# Altium PCB MSP-ISO_Rev1_0.PcbDoc
Units mil, origin at the board's own origin, x right, y up, seen from the top; angles counter-clockwise.
Board outline 1874 x 928 mil, 2 copper layers (Top Layer, Bottom Layer), stack 62 mil thick; 23 components, 27 nets, 95 pads, 32 vias.
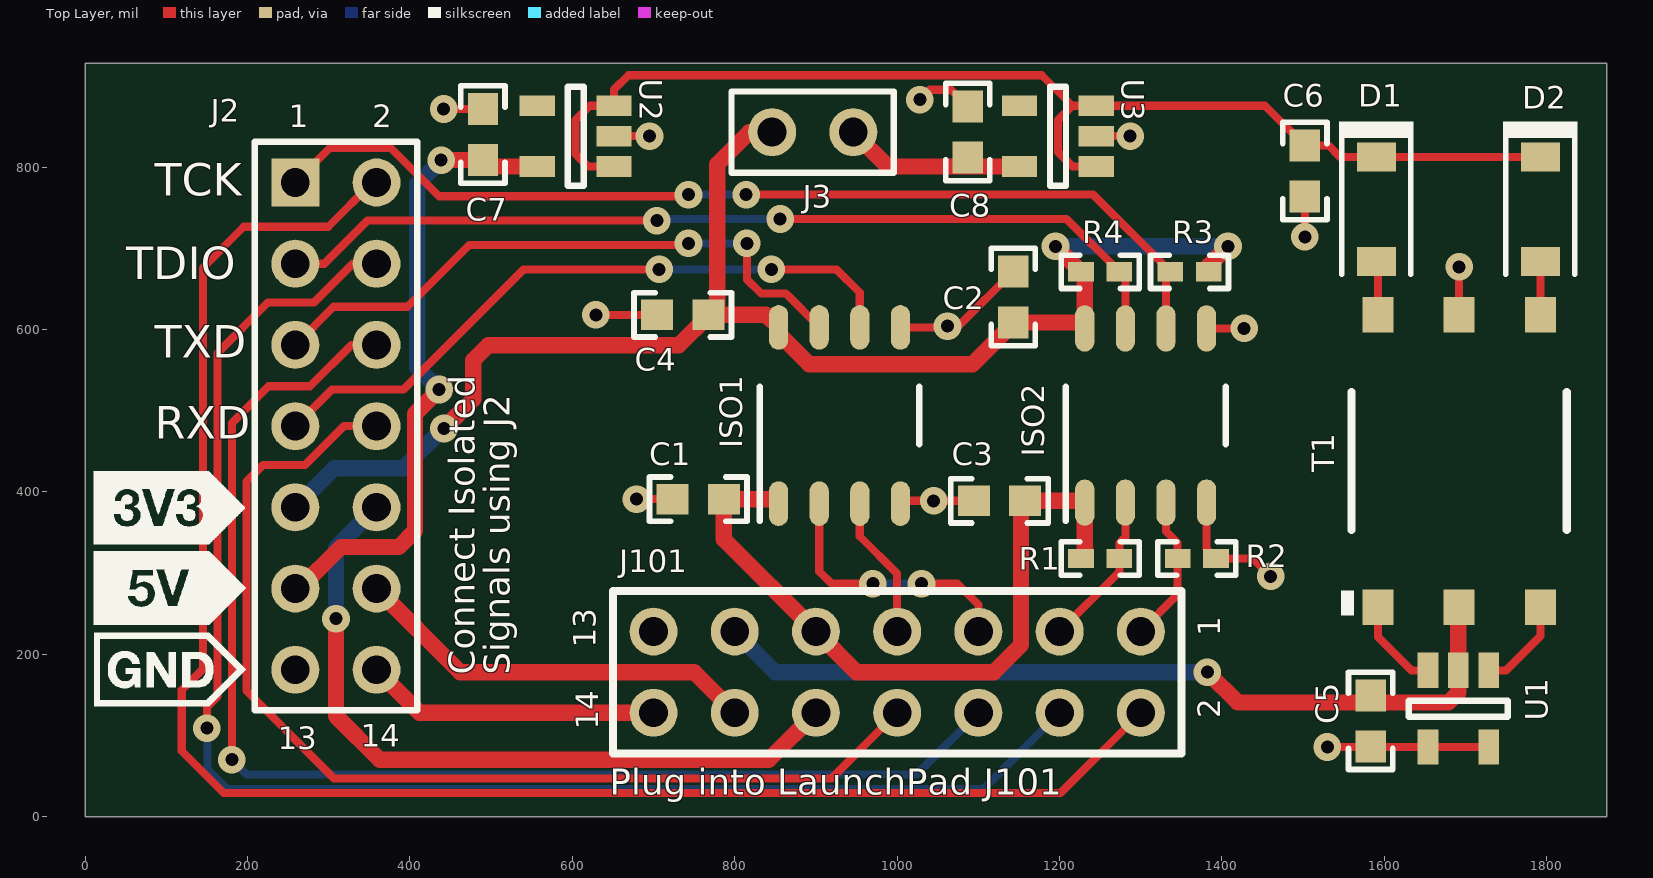
[diagram p0: Top Layer view]
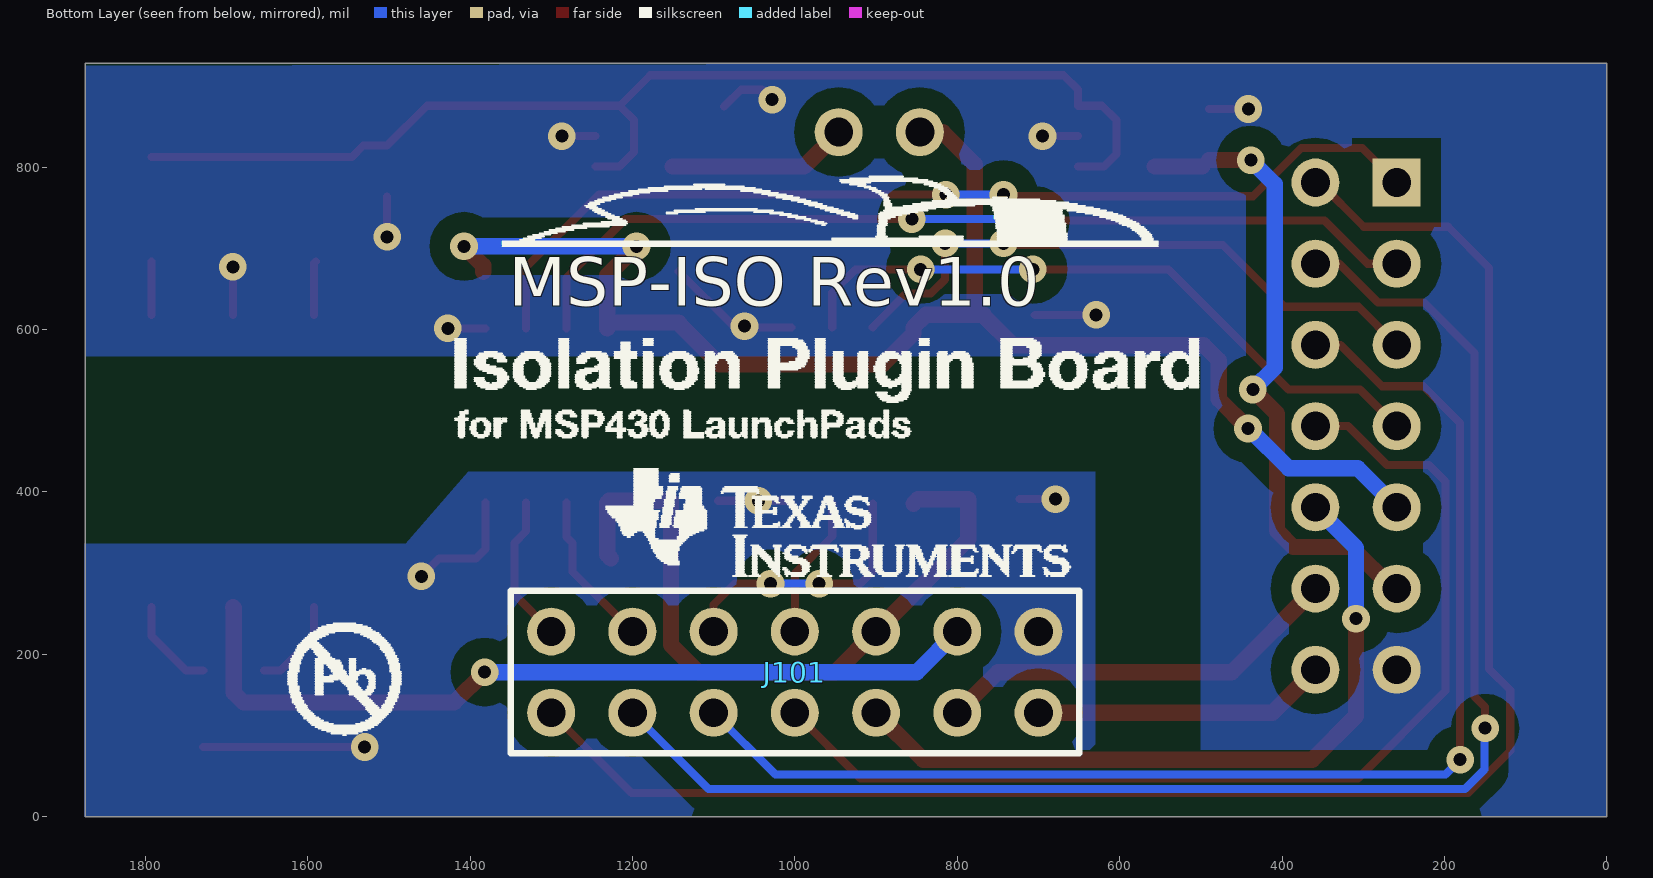
[diagram p1: Bottom Layer view, seen from below]

## Layer stack, top to bottom
Top Solder: solder mask 0.4, Solder Resist, Dk 3.5
Top Layer: signal copper 1.4
Dielectric1: core 59.2, FR-4, Dk 4.8
Bottom Layer: signal copper 1.4
Bottom Solder: solder mask 0.4, Solder Resist, Dk 3.5

## Board outline
0,0 0,928 1874,928 1874,0

## Design rules (kind name [scope] priority, off if disabled: settings)
AcuteAngle [All] p1: minimum=4.50000000000000E+0001 checktracksonly=FALSE
AssemblyTestPointUsage [All] p1: valid=2
Clearance Clearance_Keepouts [((IsTrack Or IsArc) And Not InPoly) And IsFree and IsKeepOut vs ((IsTrack Or IsArc) And Not InPoly) And IsFree and IsKeepOut] p1: gap=0
Clearance Clearance_BoardEdge_MountingHoles [OnCopper and InComponentClass('Mounting Holes') vs IsKeepOut] p2: gap=40
Clearance Clearance_BoardEdge_Poly [OnCopper and InPoly vs IsKeepOut] p3: gap=25
Clearance Clearance_BoardEdge [OnCopper and Not InComponentClass('Logo') and not InComponentClass('FiducialMark') and not InRegion(1000,500,4000,800) and Not IsKeepout vs IsKeepOut] p4: gap=75
Clearance Clearance_Poly [InPolygon] p5: gap=25
Clearance [All] p6: gap=7.87
ComponentClearance ComponentClearance_MountingHoles_FiducialMarks [InComponentClass('Mounting Holes') vs InComponentClass('FiducialMark')] p1: gap=50 collisioncheckmode=3 verticalgap=10 showdistances=FALSE
ComponentClearance ComponentClearance_Shunt [InComponentClass('Header') vs InComponentClass('Shunt')] p2: gap=0 collisioncheckmode=3 verticalgap=0 showdistances=FALSE
ComponentClearance ComponentClearance_Logo [InComponentClass('Logo')] p3: gap=50 collisioncheckmode=3 verticalgap=10 showdistances=FALSE
ComponentClearance ComponentClearance_ScrewToNut [(HasFootprint('NY PMS 440 0025 PH')) vs (HasFootprint('Keystone_1902C'))] p4: gap=5 collisioncheckmode=3 verticalgap=10 showdistances=FALSE
ComponentClearance ComponentClearance_MountingHoles [InComponentClass('Mounting Holes')] p5: gap=250 collisioncheckmode=3 verticalgap=100000 showdistances=FALSE
ComponentClearance ComponentClearance_SmallPassives [HasFootprint('0201*') or HasFootprint('0402*') or HasFootprint('0508') or HasFootprint('0603*') or HasFootprint('0612') or HasFootprint('0805*') or HasFootprint('0815*') or HasFootprint('0830*') or HasFootprint('1206*') or HasFootprint('1210*') or HasFootprint('1808*') or HasFootprint('1812*') or HasFootprint('1825*') or HasFootprint('2010*') or HasFootprint('2220*') or HasFootprint('2225*') or HasFootprint('2512*') or HasFootprint('2728*') or HasFootprint('3518*') vs HasFootprint('0201*') or HasFootprint('0402*') or HasFootprint('0508') or HasFootprint('0603*') or HasFootprint('0612') or HasFootprint('0805*') or HasFootprint('0815*') or HasFootprint('0830*') or HasFootprint('1206*') or HasFootprint('1210*') or HasFootprint('1808*') or HasFootprint('1812*') or HasFootprint('1825*') or HasFootprint('2010*') or HasFootprint('2220*') or HasFootprint('2225*') or HasFootprint('2512*') or HasFootprint('2728*') or HasFootprint('3518*')] p6: gap=20 collisioncheckmode=3 verticalgap=10 showdistances=FALSE
ComponentClearance ComponentClearance_THtoSMT [IsThruComponent vs IsSMTComponent] p7: gap=15 collisioncheckmode=3 verticalgap=15 showdistances=FALSE
ComponentClearance ComponentClearance_THtoTH [IsThruComponent vs IsThruComponent] p8: gap=10 collisioncheckmode=3 verticalgap=15 showdistances=FALSE
ComponentClearance [All] p9: gap=25 collisioncheckmode=3 verticalgap=10 showdistances=FALSE
DiffPairsRouting [All] p1: maxlimit=100 minlimit=10 mostfreqgap=10 toplayer_minwidth=15 toplayer_maxwidth=15 toplayer_prefwidth=15 bottomlayer_minwidth=15 bottomlayer_maxwidth=15 bottomlayer_prefwidth=15 maxuncoupledlength=1000
FabricationTestPointUsage TestPointUsage [All] p1: valid=2 allowmultiple=FALSE
FabricationTestpoint Testpoint [All] p1: side=3 testpointundercomponent=TRUE minsize=40 maxsize=100 preferedsize=60 minholesize=0 maxholesize=40 preferedholesize=32 testpointgrid=1 allowsidetop=TRUE allowsidebottom=TRUE usegrid=TRUE gridtolerance=0.01
FanoutControl Fanout_LCC [IsLCC] p1: bgadir=Out bgaviamode=Centered fanoutstyle=Auto fanoutdirection=Alternating viagrid=1 // Fanout_LCC (Default Rule)
FanoutControl Fanout_BGA [IsBGA] p2: bgadir=Out bgaviamode=Centered fanoutstyle=Auto fanoutdirection=Alternating viagrid=1 // Fanout_BGA (Default Rule)
FanoutControl Fanout_Default [All] p4: bgadir=Out bgaviamode=Centered fanoutstyle=Auto fanoutdirection=Alternating viagrid=1 // Fanout_Default (Default Rule)
FanoutControl Fanout_Small [(CompPinCount < 5)] p5: bgadir=Out bgaviamode=Centered fanoutstyle=Auto fanoutdirection=OutThenIn viagrid=1 // Fanout_Small (Default Rule)
HoleSize [All] p1: absolutevalues=TRUE maxlimit=251 minlimit=8 maxpercent=80.000 minpercent=20.000
MinimumAnnularRing MinimumAnnularRing_ThermalPadVias [IsVia and InAnyComponent] p1: minimumring=5.91
MinimumAnnularRing [All] p2: minimumring=9
MinimumSolderMaskSliver MinimumSolderMaskSliver_Logo [InComponentClass('Logo') vs InComponentClass('Logo')] p1: minsoldermaskwidth=0.7
MinimumSolderMaskSliver [All] p2: minsoldermaskwidth=3.94
PlaneConnect [All] p1: planeconnectstyle=Direct reliefexpansion=10 reliefentries=4 reliefconductorwidth=10 reliefairgap=10
PolygonConnect [All] p1: connectstyle=Direct reliefconductorwidth=10 reliefentries=4 polygonreliefangle="90 Angle" airgapwidth=10
RoutingVias ThermalPadVias [IsVia and InAnyComponent] p1: holewidth=7.87 width=19.68 viastyle="Through Hole" minholewidth=7.87 minwidth=19.68 maxholewidth=12.99 maxwidth=23.62
RoutingVias [All] p2: holewidth=16 width=34 viastyle="Through Hole" minholewidth=7.87 minwidth=26 maxholewidth=40 maxwidth=65
SilkToBoardRegionClearance [Not ((IsComment or IsDesignator) And (Hide <> 'False')) and not InRegion(1000,500,4000,800)] p1:
SilkToSilkClearance SilkToSilkClearance_Pb-FreeLogo [(HasFootprint('Pb-Free_Overlay_Medium') OR HasFootprint('Pb-Free_Overlay_Small')) vs (HasFootprint('Pb-Free_Overlay_Medium') OR HasFootprint('Pb-Free_Overlay_Small'))] p1: silktosilkclearance=0
SilkToSilkClearance [All] p2: silktosilkclearance=5
SilkToSolderMaskClearance "Silk to Solder Mask Opening" [All] p1: minsilkscreentomaskgap=1 clearancetoexposedcopper=FALSE
SolderMaskExpansion [All] p1: expansion=2
UnpouredPolygon [All] p1: allowunpoured=FALSE
Width Width_Power [(InNet('3V3_1') OR InNet('3V3_2') OR InNet('5V_1') OR InNet('ISO_3V3') OR InNet('ISO_5V') OR InNet('LDO_3V3') OR InNet('VO_DCR_5V'))] p1: maxlimit=20 minlimit=10 preferedwidth=20
Width [All] p2: maxlimit=100 minlimit=6 preferedwidth=10 checkconnectedcopper=TRUE
14 further rules are at their usual default settings.

## Classes and differential pairs
component class Addon_Board_v6: C1 C2 C3 C4 C5 C6 C7 C8 D1 D2 ISO1 ISO2 R1 R2 R3 R4 T1 U1 U2 U3

## Components (designator, comment, footprint, x,y, rotation, side; value= is the part's Value field where it differs from the comment)
C1 "0603YC104JAT2A" 0603 755,391 r180 top
C2 "0603YC104JAT2A" 0603 1143,640 r90 top
C3 "0603YC104JAT2A" 0603 1126,389 r180 top
C4 "0603YC104JAT2A" 0603 736,618 r180 top
C5 "C1608X7R1C105K" 0603 1583,118 r270 top
C6 "C1608X7R1C105K" 0603 1502,795 r270 top
C7 "C1608X5R0J475M" 0603 490,840 r90 top
C8 "C1608X5R0J475M" 0603 1087,843 r90 top
D1 "MBR0520LT1G" SOD-123 1590,748 r270 top
D2 "MBR0520LT1G" SOD-123 1792,748 r270 top
ISO1 "ISO7321CDR" D0008B_N 929,494 r90 top
ISO2 "ISO1541DR" D0008A_N 1306,494 r90 top
J2 "Header 7X2" HDR2X7#1 258.9,780.95 r270 top
J3 "Supply_components" HDR1X2 846,843 r0 top
J101 "Header 7X2" HDR2X7#2 1300,228 r180 bottom (schematic designator J1)
R1 "CRCW04021K50JNED" 0402 1250,318 r180 top
R2 "CRCW040230K0JNED" 0402 1369,318 r180 top
R3 "CRCW0402150RJNED" 0402 1250,671 r180 top
R4 "CRCW0402270RJNED" 0402 1360,671 r0 top
T1 "760390014" Wurth_760390013 1692,438 r90 top
U1 "SN6501DBV" DBV0005A_N 1691,133 r270 top
U2 "TPS76350DBVR" DBV0005A_N 604,838 r180 top
U3 "TPS76333DBVR" DBV0005A_N 1198,838 r180 top

## Footprints (in the part's own frame and the unit in brackets; to place one, negate y for a bottom-side part, rotate by r counter-clockwise, add the part's x,y. Pads: shape width x height; smd on the part's side, far side on the other; paste and mask are expansions set on the pad)
0402 [mm] "0402 from SM-752 data"
  rect 0.8x0.6 smd: 1(-0.6,0) 2(0.6,0)
  silkscreen extent -1.22,-0.52 1.22,0.52, body extent -0.55,-0.3 0.55,0.3, height 0.6
0603 [mm] "0603 from SM-752 data"
  rect 1x0.95 smd: 1(-0.8,0) 2(0.8,0)
  silkscreen extent -1.52,-0.69 1.52,0.69, body extent -0.87,-0.47 0.87,0.47, height 0.85
D0008A_N [mm] "SOIC, 8-Leads, Body 4.9x3.9mm, Pitch 1.27mm, IPC Medium Density"
  oval 1.45x0.6 smd: 1(-2.725,1.905) 2(-2.725,0.635) 3(-2.725,-0.635) 4(-2.725,-1.905) 5(2.725,-1.905) 6(2.725,-0.635) 7(2.725,0.635) 8(2.725,1.905)
  silkscreen extent -3.3,-2.5 0.9,2.5, body extent -3,-2.45 3,2.45, height 1.63
D0008B_N [mil] "SOIC, 8-Leads, Body 4.9x3.9mm, Pitch 1.27mm, IPC Medium Density"
  oval 55x23.62 smd: 1(-108.5,75) 2(-108.5,25) 3(-108.5,-25) 4(-108.5,-75) 5(108.5,-75) 6(108.5,-25) 7(108.5,25) 8(108.5,75)
  silkscreen extent -130,-98 35,98, body extent -118,-96 118,96, height 64
DBV0005A_N [mm] "SOT23, 5-Leads, Body 2.9x1.6mm, Pitch 0.95mm, Lead Span 2.8mm, IPC Medium Density"
  rect 1.1x0.65 smd: 1(-1.2,0.95) 2(-1.2,0) 3(-1.2,-0.95) 4(1.2,-0.95) 5(1.2,0.95)
  silkscreen extent -0.25,-1.55 0.25,1.55, body extent -1.42,-1.46 1.42,1.46, height 1.08
HDR1X2 [mm] "Connector; Header; 2 Position"
  round 1.5 hole 0.9 mask+0.127: 1(0,0) 2(2.54,0)
  silkscreen extent -1.27,-1.27 3.81,1.27
HDR2X7#1 [mm] "Connector; Header; 7x2 Position"
  rect 1.5x1.5 hole 0.9 mask+0.127: 1(0,0)
  round 1.5 hole 0.9 mask+0.127: 2(0,2.54) 3(2.54,0) 4(2.54,2.54) 5(5.08,0) 6(5.08,2.54) 7(7.62,0) 8(7.62,2.54) 9(10.16,0) 10(10.16,2.54) 11(12.7,0) 12(12.7,2.54) 13(15.24,0) 14(15.24,2.54)
  silkscreen extent -1.27,-1.27 16.51,3.81
HDR2X7#2 [mm] "Connector; Header; 7x2 Position"
  round 1.5 hole 0.9 mask+0.127: 1(0,0) 2(0,-2.54) 3(2.54,0) 4(2.54,-2.54) 5(5.08,0) 6(5.08,-2.54) 7(7.62,0) 8(7.62,-2.54) 9(10.16,0) 10(10.16,-2.54) 11(12.7,0) 12(12.7,-2.54) 13(15.24,0) 14(15.24,-2.54)
  silkscreen extent -1.27,-3.81 16.51,1.27
SOD-123 [mm] "On Semi recommended land pattern"
  rect 0.915x1.22 smd: 1(-1.638,0) 2(1.637,0)
  silkscreen extent -2.74,-1.17 2.03,1.17, body extent -1.93,-0.9 1.93,0.9, height 1.35
Wurth_760390013 [mil] "Wurth"
  rect 44x38 smd: 1(-180,100) 2(-180,0) 3(-180,-100) 4(180,-100) 5(180,0) 6(180,100)
  silkscreen extent -190,-132 85,145, body extent -198,-135 198,130, height 166

## Part data
C1 C2 C3 C4: "CAP, CERM, 0.1 µF, 16 V, +/- 5%, X7R, 0603"
C5 C6: "CAP, CERM, 1 µF, 16 V, +/- 10%, X7R, 0603"
C7 C8: "CAP, CERM, 4.7 µF, 6.3 V, +/- 20%, X5R, 0603"
D1 D2: "Diode, Schottky, 20 V, 0.5 A, SOD-123"
ISO1: "Robust EMC, Low Power, Dual-Channel Digital Isolators, D0008B"
ISO2: "Low-Power Bidirectional I2C Isolators, D0008A"
J2 J101: "Header, 7-Pin, Dual row"
J3: library part "Header 2", "Header, 2-Pin"
R1: "RES, 1.5 k, 5%, 0.063 W, 0402"
R2: "RES, 30 k, 5%, 0.063 W, 0402"
R3: "RES, 150, 5%, 0.063 W, 0402"
R4: "RES, 270, 5%, 0.063 W, 0402"
T1: "Transformer, 475uH, SMT"
U1: "Transformer Driver for Isolated Power Supplies, DBV0005A"
U2: "Single Output LDO, 150 mA, Fixed 5 V Output, 2.7 to 10 V Input, with Low IQ, 5-pin SOT-23 (DBV), -40 to 125 degC, Green (RoHS & no Sb/Br)"
U3: "Single Output LDO, 150 mA, Fixed 3.3 V Output, 2.7 to 10 V Input, with Low IQ, 5-pin SOT-23 (DBV), -40 to 125 degC, Green (RoHS & no Sb/Br)"

## Via types
v1: diameter 34, hole 16, Top Layer to Bottom Layer, tented both sides, 32 vias

## Nets (pads, with @x,y where several pads share a name; then routed paths per layer and width w, separated by ;. In a path a pad name is that pad's centre, name@x,y a point inside that pad or via, vN(x,y) a via of type N, cw(c..) or ccw(c..) an arc to the next point about the centre after c; other vN are vias at no path point)
3V3_1: C1.1 C3.1 ISO1.1 ISO2.1 J101.9 R1.2 | length 889.5
  Top Layer w20: ISO1.1 848.5,391 C1.1 786.5,341.5 J101.9 950,178 1119,178 1152.6,211.6 C3.1@1152.6,389 ; C3.1 1228.72,389 ISO2.1 1231,322.62 R1.2
3V3_2: C2.1 C4.1 ISO1.8 ISO2.8 J2.9 J3.1 R3.2 R4.2 | length 1770.8
  Top Layer w20: v1(442,478) 478,514 478,562 496.43,580.43 731.09,580.43 C4.1@766.99,616.33 ; C4.1 838.5,618 ISO1.8 854,594.83 891.7,557.13 1092.84,557.13 1143,607.28 C2.1 ISO2.8@1223.78,608.5 ; C4.1@778.5,627.84 778.5,803.5 818,843 J3.1 ; v1(1195,702.38) R3.2 1231,666.38 ISO2.8 ; R4.2 1383.62,678.62 v1(1407.38,702.38)
  Bottom Layer w20: J2.9 306.95,429 392,429 441,478 v1(442,478) ; v1(1195,702.38) v1(1407.38,702.38)
5V_1: C5.1 J101.11 T1.2 U1.2 | length 1042.8
  Top Layer w20: v1(1382,178) 1419.28,140.72 1679.03,140.72 1691,152.69 U1.2 1691,257 T1.2
  Bottom Layer w20: J101.11@805,228 J101.11 850,178 v1(1382,178)
5V_2: C7.1 J2.11 U2.5 | length 779.3
  Top Layer w20: J2.11 263.95,280.95 315,332 386.21,332 406.3,352.09 406.3,496.3 v1(436,526) ; v1(438.5,808.5) C7.1 ; C7.1@497.91,800.6 U2.5
  Bottom Layer w20: v1(436,526) 409,553 409,779 v1(438.5,808.5)
EZFET_SBWTCK: ISO2.3 J101.1 R2.2 | length 183.5
  Top Layer w10: J101.1 1345.38,273.38 R2.2 1345.38,337.12 1331,351.5 ISO2.3
EZFET_SBWTDIO: ISO2.2 J101.3 R1.1 | length 192.3
  Top Layer w10: J101.3 1273.62,301.62 R1.1 1273.62,337.12 1281,344.5 ISO2.2
EZFET_UARTRXD: ISO1.2 J101.5 | length 341.6
  Top Layer w10: ISO1.2 904,302 919,287 v1(970,287) ; v1@1017.87,287 v1(1030,287) 1074.04,287 1100,261.04 J101.5
  Bottom Layer w10: v1(970,287) v1(1030,287)
EZFET_UARTTXD: ISO1.3 J101.7 | length 200.3
  Top Layer w10: ISO1.3 954,345.36 1000,299.36 J101.7 J101.7@976.26,228
GND1: C1.2 C3.2 C5.2 ISO1.4 ISO2.4 J101.13 R2.1 U1.4 U1.5 | length 485.1
  Top Layer w10: v1(679,391) C1.2 ; ISO1.4 1007.5,389 v1(1045,389) C3.2 ; ISO2.4 1381,329.62 R2.1 1438,318 v1(1460,296) ; v1(1529.76,85.76) U1.4 U1.5
GND2: C2.2 C4.2 C6.2 C7.2 C8.2 ISO1.5 ISO2.5 J2.13 T1.5 U2.2 U3.2 | length 608
  Top Layer w10: v1(441.49,871.49) C7.2 ; v1(629,618) C4.2 ; U2.2 v1(695,838) ; ISO1.5 v1@1060.5,602.5 ; v1(1028,883) 1040.13,895.13 1066.37,895.13 C8.2 ; v1(1062,604) 1075.5,604 C2.2 ; U3.2 v1(1287,838) ; ISO2.5 v1(1427.28,601.28) ; v1(1502,714) C6.2 ; T1.5 v1(1692,677)
  Bottom Layer w10: v1@1024,887 v1(1028,883)
ISO_SBWTCK: ISO2.6 J2.1 R4.1 | length 1237.8
  Top Layer w10: J2.1 301.3,823.36 376.46,823.36 435.82,764 745,764 v1(743,766) ; v1@812,766 v1(814,766) 1241.38,766 R4.1 1331,665.62 ISO2.6
  Bottom Layer w10: v1(743,766) v1(814,766)
ISO_SBWTDIO: ISO2.7 J2.3 R3.1 | length 1137
  Top Layer w10: J2.3 294.95,680.95 348,734 v1(704,734) ; v1(856,736) 1208.62,736 R3.1 1281,663.62 ISO2.7
  Bottom Layer w10: v1(704,734) 705.87,735.87 v1@855.87,735.87
ISO_UARTRXD: ISO1.6 J2.7 | length 829.8
  Top Layer w10: J2.7 303.95,526 392,526 540,674 v1(707,674) ; v1(845,674) 925.46,674 954,645.46 ISO1.6
  Bottom Layer w10: v1(707,674) v1(845,674)
ISO_UARTTXD: ISO1.7 J2.5 | length 772.9
  Top Layer w10: J2.5 305.95,628 397,628 473.13,704.13 741.13,704.13 v1(743,706) ; v1(815,706) v1@815,713 ; v1@815.13,705.88 815.13,661.63 832.63,644.13 862.37,644.13 863.63,642.87 864.22,642.87 904,603.1 ISO1.7
  Bottom Layer w10: v1(743,706) v1(815,706)
NetC6_1: C6.1 D1.1 D2.1 U2.1 U2.3 U3.1 U3.3 | length 1478.5
  Top Layer w10: U2.1 619.4,800.6 604,816 604,857.68 621.72,875.4 U2.3 651.25,895.25 669,913 1178,913 1215.6,875.4 1215.72,875.4 ; U3.1 1215.72,800.6 1198,818.31 1198,857.68 1215.72,875.4 ; D2.1 D1.1 1545.53,812.47 1531.5,826.5 C6.1 1453.1,875.4 U3.3 1215.72,875.4
NetC8_1: C8.1 J3.2 U3.5 | length 222.3
  Top Layer w20: J3.2 988.4,800.6 U3.5
NetD1_2: D1.2 T1.6 | length 66.4
  Top Layer w10: D1.2 1592,681.53 T1.6
NetD2_2: D2.2 T1.4 | length 65.5
  Top Layer w10: T1.4 D2.2
NetJ2_2: J2.2 J101.2 | length 2106.5
  Top Layer w10: J2.2 353.95,780.95 299.43,726.43 195.43,726.43 145,676 145,182 119,156 119,81 170.75,29.25 1201.25,29.25 J101.2
NetJ2_4: J2.4 J101.4 | length 1858.2
  Top Layer w10: v1(150,109) 150,135.17 162.88,148.04 162.88,570.88 225,633 282,633 329.95,680.95 J2.4
  Bottom Layer w10: v1(150,109) 150.88,108.13 150.88,57.88 174.63,34.13 1106.13,34.13 J101.4
NetJ2_6: J2.6 J101.6 | length 1590.8
  Top Layer w10: v1(180.75,70.25) 180.75,484.75 226,530 277,530 327.95,580.95 J2.6
  Bottom Layer w10: v1(180.75,70.25) 199,52 1024,52 J101.6
NetJ2_8: J2.8 J101.8 | length 1325.7
  Top Layer w10: J2.8 318.86,480.95 270.91,433 219,433 198.62,412.62 198.62,155.1 306.6,47.13 919.13,47.13 J101.8
NetJ2_10: J2.10 J101.10 | length 915.1
  Top Layer w20: v1(308.95,243.95) 308.95,124.06 363,70 842,70 J101.10
  Bottom Layer w20: v1(308.95,243.95) 308.95,331 J2.10
NetJ2_12: J2.12 J101.12 | length 504.5
  Top Layer w20: J2.12 461.85,178 750,178 J101.12
NetJ2_14: J2.14 J101.14 | length 363
  Top Layer w20: J2.14 411.85,128 J101.14
NetT1_1: T1.1 U1.3 | length 115.2
  Top Layer w10: T1.1 1592,221.49 1633.25,180.25 U1.3
NetT1_3: T1.3 U1.1 | length 116.6
  Top Layer w10: U1.1 1749.75,180.25 1792,222.49 T1.3
pads on no net: U2.4 U3.4

## Polygon pours and split planes (outlines as drawn)
GND2 on Bottom Layer "Top Layer-No Net" (solid, remove dead copper, pour order 15): 0,878.55 0,0 500,0 500,567 1874,567 1874,924.86 599,928 212,928 0,928
GND1 on Bottom Layer "Bottom Layer-No Net" (solid, remove dead copper, pour order 18): 1875.06,0 1875.06,94.63 1875.06,336 1771.54,336 1582,336 1479.41,336 1402.4,425 630,425 630,0

## Keep-outs
Keep-Out Layer:
  text ".Layer_Name" at -4434.1,-3547.53 h60

## Other copper
Top Layer:
  text ".Layer_Name" at -4434.1,-3547.53 h60
Bottom Layer:
  text ".Layer_Name" at -4434.1,-3547.53 h60

## Silkscreen, mask and mechanical layers (free items; w line width, h text height)
Top Overlay:
  drawing of 2463 lines, arcs and shapes, not listed
  text "TCK" at 85.62,764.36 h40
  text "TDIO" at 51,662 h40
  text "TXD" at 85.62,565.13 h40
  text "RXD" at 85.62,465.13 h40
  text "Connect Isolated" at 480,175 h32 r90
  text "Signals using J2" at 523,175 h32 r90
  text "Plug into LaunchPad J101" at 646,27 h32
  text ".Layer_Name" at -4434.1,-3547.53 h60
Bottom Overlay:
  drawing of 2224 lines, arcs and shapes, not listed
  text "MSP-ISO Rev1.0" at 1352,629 h60
  text ".Layer_Name" at -4434.1,-3547.53 h60
Top Paste:
  text ".Layer_Name" at -4434.1,-3547.53 h60
Bottom Paste:
  text ".Layer_Name" at -4434.1,-3547.53 h60
Top Solder:
  text ".Layer_Name" at -4434.1,-3547.53 h60
  text ".Layer_Name" at -4434.1,-3547.53 h60
Bottom Solder:
  text ".Layer_Name" at -4434.1,-3547.53 h60
Drill Guide:
  text ".Layer_Name" at -4434.1,-3547.53 h60
M1 Board Outline:
  the board outline again, w10
  text ".Layer_Name" at -4434.1,-3547.53 h60
M2 Board Dimensions:
  rectangle: -5011.1,-2964.04 -4886.1,-2839.04
  rectangle: -4886.1,-3089.04 -4511.1,-2964.04
  lines w7: -5011.1,-2964.04 -4011.1,-2964.04 ; -4886.1,-3089.04 -4886.1,-2839.04 ; -4761.1,-3089.04 -4761.1,-2839.04 ; -4511.1,-3089.04 -4511.1,-2839.04 ; -4261.1,-3089.04 -4261.1,-2839.04 ; -5011.1,-3089.04 -4011.1,-3089.04 -4011.1,-2839.04 -5011.1,-2839.04 -5011.1,-3089.04
  text ".Layer_Name" at -4434.1,-3547.53 h60
M3 3D STEP Top:
  text ".Layer_Name" at -4434.1,-3547.53 h60
M4 3D STEP Bottom:
  text ".Layer_Name" at -4434.1,-3547.53 h60
M5 Assembly Top:
  lines w10: -5303.1,-3619.21 1296.9,-3619.21 ; -5303.1,-3415.87 1298.9,-3415.87 ; -5303.1,-3212.54 -5303.1,-3822.54 -1298.1,-3822.54 1298.9,-3822.54 1298.9,-3212.54 -5302.6,-3212.54 -5302.6,-3822.54 -3727.1,-3822.54 ; -2838.1,-3822.54 -2838.1,-3212.54 ; -1571.1,-3415.87 -1571.1,-3212.54 ; -731.1,-3415.87 -731.1,-3212.54 ; -109.1,-3829.04 -109.1,-3626.21
  text "COMPONENTS MARKED 'DNP' SHOULD NOT BE POPULATED." at -3857.6,-3007.54 h60
  text "ASSEMBLY VARIANT:" at -3858.1,-3123.04 h60
  text ".VariantName" at -2822.1,-3123.04 h60
  text "PCB VIEWED FROM TOP SIDE" at -5239.6,-3344.71 h60
  text "BOARD #:" at -2763.1,-3344.71 h60
  text ".PRJ_Number" at -2217.6,-3344.71 h60
  text "REV:" at -1373.1,-3344.71 h60
  text ".PCB_Rev" at -1081.6,-3344.71 h60
  text "SVN REV:" at -535.1,-3344.71 h60
  text ".VersionControl_RevNumber" at -29.1,-3344.71 h60
  text "PLOT NAME =" at -5239.6,-3753.38 h60
  text ".plot_File_Name" at -4434.1,-3753.38 h60
  text "GENERATED    :" at -2761.1,-3753.38 h60
  text ".Print_Date" at -1891.6,-3753.38 h60
  text ".Print_Time" at -1162.6,-3753.38 h60
  text "TEXAS INSTRUMENTS" at 101.9,-3753.38 h60
  text "PLOT NAME =" at -901.37,-5654.56 h60
M6 Assembly Bottom:
  lines w10: -5303.6,-3416.37 1298.4,-3416.37 ; -5301.6,-3619.71 1298.4,-3619.71 ; -3895.6,-3829.54 -3895.6,-3626.71 ; -3273.6,-3416.37 -3273.6,-3213.04 ; -2433.6,-3416.37 -2433.6,-3213.04 ; -1166.6,-3823.04 -1166.6,-3213.04 ; -277.6,-3823.04 1297.9,-3823.04 1297.9,-3213.04 -5303.6,-3213.04 -5303.6,-3823.04 -2706.6,-3823.04 1298.4,-3823.04 1298.4,-3213.04 ; 1512,94 1512,296.83
  text "COMPONENTS MARKED 'DNP' SHOULD NOT BE POPULATED." at 1090.9,-3007.04 h60
  text ".VariantName" at 46.9,-3123.04 h60
  text "ASSEMBLY VARIANT:" at 1085.9,-3123.04 h60
  text ".VersionControl_RevNumber" at -3975.6,-3345.21 h60
  text "SVN REV:" at -3469.6,-3345.21 h60
  text ".PCB_Rev" at -2923.1,-3345.21 h60
  text "REV:" at -2631.6,-3345.21 h60
  text ".PRJ_Number" at -1787.1,-3345.21 h60
  text "BOARD #:" at -1241.6,-3345.21 h60
  text "PCB VIEWED FROM BOTTOM SIDE" at 1234.9,-3345.21 h60
  text "TEXAS INSTRUMENTS" at -4106.6,-3753.88 h60
  text ".Print_Time" at -2842.1,-3753.88 h60
  text ".Print_Date" at -2113.1,-3753.88 h60
  text "GENERATED    :" at -1243.6,-3753.88 h60
  text ".plot_File_Name" at 429.4,-3753.88 h60
  text "PLOT NAME =" at 1234.9,-3753.88 h60
M9 Title Sheet:
  drawing of 57 lines, arcs and shapes, not listed
  text "1" at -4271.26,5347.46 h70
  text "2" at -1775.6,5347.46 h70
  text "3" at 713.75,5347.46 h70
  text "4" at 3220.41,5347.46 h70
  text "5" at 5719.4,5347.46 h70
  text "6" at 8224.4,5347.46 h70
  text "A" at -5427.6,4204.46 h70
  text "A" at 9372.4,4204.46 h70
  text "B" at -5427.6,1824.46 h70
  text "B" at 9372.4,1824.46 h70
  text "C" at -5427.6,-550.54 h70
  text "C" at 9372.4,-550.54 h70
  text "PROJECT TITLE:" at 6332.4,-2411.54 h45
  text ".PRJ_Title" at 6382.4,-2544.87 h70
  text "DESIGNED FOR:" at 6332.4,-2712.54 h45
  text ".PRJ_Customer" at 6382.4,-2852.54 h70
  text "D" at -5427.6,-2920.54 h70
  text "D" at 9372.4,-2920.54 h70
  text "FILE NAME:" at 6332.4,-3012.54 h45
  text ".PCB_File_Name_No_Path" at 6382.4,-3132.54 h70
  text "Texas Instruments (TI) and/or its licensors do not warrant the accuracy or completeness of this specification" at 1362.9,-3294.38 h45
  text "ENGINEER:" at 6332.4,-3302.54 h45
  text "LAYOUT BY:" at 7837.4,-3302.54 h45
  text "or any information contained therein. TI and/or its licensors do not warrant that this design will meet" at 1317.92,-3407.05 h45
  text ".PRJ_Engineer" at 6382.4,-3457.53 h70
  text ".PCB_Layout" at 7887.9,-3457.53 h70
  text "the specifications, will be suitable for your application or fit for any particular purpose, or will operate in" at 1317.92,-3519.71 h45
  text ".Layer_Name" at -4434.1,-3547.53 h60
  text "ALTIUM DESIGNER VERSION:" at 7837.4,-3612.54 h45
  text "an implementation. TI and/or its licensors do not warrant that the design is production worthy. You should" at 1317.92,-3632.38 h45
  text "completely validate and test your design implementation to confirm the system functionality for your application." at 1362.9,-3745.04 h45
  text ".print_Scale" at 6382.4,-3745.87 h70
  text ".Application_BuildNumber" at 7887.9,-3745.87 h70
  text "1" at -4271.26,-3952.54 h70
  text "2" at -1775.6,-3952.54 h70
  text "3" at 713.75,-3952.54 h70
  text "4" at 3220.41,-3952.54 h70
  text "5" at 5719.4,-3952.54 h70
  text "6" at 8224.4,-3952.54 h70
M10 Fab Notes:
  drawing of 185 lines, arcs and shapes, not listed
  text "DESIGN INFORMATION" at 7369.92,3220.96 h60
  text "MIN. TRACK WIDTH:" at 6725.36,3040.96 h60
  text "8" at 7821.6,3040.96 h60
  text "MIL" at 7976.36,3040.96 h60
  text "MIN. CLEARANCE:" at 6725.36,2908.96 h60
  text "0.2" at 7761.6,2908.96 h60
  text "mm" at 7976.36,2908.96 h60
  text "MIN. VIA PAD SIZE:" at 6725.36,2776.96 h60
  text "24" at 7791.61,2776.96 h60
  text "MIL" at 7976.36,2776.96 h60
  text "0.05mm (2MIL)" at 7420.36,2635.25 h60
  text "MINIMUM ANNULAR RING" at 6396.13,2630.96 h60
  text "EXTERNAL" at 8128.36,2630.96 h60
  text "PER" at 6596.13,2512.96 h60
  text "IPC-D-275 CLASS 2 LEVEL C" at 6816.13,2512.96 h60
  text "MIL, HOLES" at 8304.36,2400.67 h60
  text "+/-" at 7911.9,2399.96 h60
  text "+/-" at 8765.9,2399.96 h60
  text "REGISTRATION TOLERANCES:" at 6396.13,2394.96 h60
  text "METAL" at 7595.9,2394.96 h60
  text "5" at 8172.1,2394.96 h60
  text "3" at 9005.1,2394.96 h60
  text "MIL" at 9121.36,2394.96 h60
  text "MATERIAL:" at 6321.36,2185.5 h60
  text "FR-4 High Tg" at 7307.8,2045.17 h60
  text "FR-408" at 6742.36,2036.6 h60
  text "X" at 7154.36,2036.6 h60
  text "OTHER" at 8230.36,2036.6 h60
  text "62 MIL (1.6mm) +/-10%" at 7062.46,1873.88 h60
  text "THICKNESS:" at 6396.13,1869.6 h60
  text "X" at 6934.3,1869.6 h60
  text "OTHER" at 8347.36,1869.6 h60
  text "TOLERANCE:" at 6396.13,1711.6 h60
  text "X" at 7235.44,1711.6 h60
  text "ANSI IPC-6012 TYPE 3 CLASS 2" at 7422.38,1711.6 h60
  text "OTHER +/-" at 7422.36,1555.6 h60
  text "BOW & TWIST:" at 6396.13,1398.6 h60
  text "X" at 7235.44,1398.6 h60
  text "ANSI IPC-6012 TYPE 3 CLASS 2" at 7422.38,1398.6 h60
  text "OTHER +/-" at 7422.36,1240.09 h60
  text "DRILLING:" at 6321.36,1101.6 h60
  text "REFERENCE:" at 6396.13,984.6 h60
  text "X" at 7044.36,984.6 h60
  text "AS SHOWN" at 7231.36,984.6 h60
  text "X" at 7945.36,984.6 h60
  text "NC_DRILL FILES" at 8082.36,984.6 h60
  text "PTH MIN COPPER THICKNESS:" at 6396.13,826.6 h60
  text "X" at 7746.36,826.6 h60
  text "1MIL" at 7883.36,826.6 h60
  text "OTHER" at 8380.36,826.6 h60
  text "BOARD FINISH:" at 6321.36,667.6 h60
  text "SILKSCREEN:" at 6476.58,549.6 h60
  text "X" at 7425.36,549.6 h60
  text "TOP" at 7551.36,549.6 h60
  text "X" at 7935.36,549.6 h60
  text "BOTTOM" at 8062.36,549.6 h60
  text "SILKSCREEN COLOR:" at 6476.58,382.6 h60
  text "X" at 7424.32,382.6 h60
  text "WHITE" at 7551.36,382.6 h60
  text "OTHER" at 8062.36,382.6 h60
  text "SOLDER RESIST COLOR:" at 6476.58,212.6 h60
  text "X" at 7044.32,53.4 h60
  text "RED" at 7171.36,53.4 h60
  text "BLUE" at 7762.36,53.4 h60
  text "OTHER" at 8300.36,53.4 h60
  text "IMMERSION GOLD (ENIG)" at 7382.36,-135.12 h60
  text "ENEPIG" at 8719.9,-138.4 h60
  text "SURFACE FINISH:" at 6321.36,-139.4 h60
  text "X" at 7195.42,-139.4 h60
  text "IMM. TIN/SILVER OR EQUIV" at 6650.9,-296.4 h60
  text "OTHER" at 8082.36,-296.4 h60
  text "ARRAY/PANEL:" at 6321.36,-475.4 h60
  text "CUT AND TRIM PER MECH LAYER 1" at 7382.36,-479.69 h60
  text "N.C. ROUTE" at 7382.36,-631.4 h60
  text "X" at 8061.36,-631.4 h60
  text "V. SCORE" at 8248.36,-631.4 h60
  text "CERTIFICATION:" at 6321.36,-768.4 h60
  text "MATERIALS AND WORKMANSHIP FOR ALL PCBS" at 7046.36,-768.4 h60
  text "TO MEET OR EXCEED THE REQUIREMENTS OF:" at 7046.36,-866.4 h60
  text "X" at 6672.87,-1002.91 h60
  text "ANSI IPC-A-600F CLASS ->" at 6811.86,-1002.91 h60
  text "X" at 8450.92,-1002.91 h60
  text "2" at 8569.86,-1002.91 h60
  text "1" at 8254.87,-1004.4 h60
  text "3" at 8923.86,-1004.4 h60
  text "X" at 6674.92,-1162.4 h60
  text "UL 94V-0" at 6811.87,-1162.4 h60
  text "X" at 7486.92,-1162.4 h60
  text "RoHS" at 7623.87,-1162.4 h60
  text "OTHER" at 8268.27,-1162.4 h60
  text "PER ORDER" at 8665.32,-1162.4 h60
  text "ADDITIONAL REQUIREMENTS:" at 6321.36,-1303.4 h60
  text "MICROSECTION:" at 6396.13,-1418.4 h60
  text "YES" at 7301.86,-1418.4 h60
  text "REQUIRED" at 8163.36,-1574.55 h60
  text "BARE BOARD ELEC. TEST:" at 6396.13,-1577.4 h60
  text "NONE" at 7701.86,-1577.4 h60
  text "X" at 8036.36,-1577.4 h60
  text "PER ORDER" at 8755.36,-1577.4 h60
  text "MANUFACTURER'S UL:" at 6396.13,-1734.4 h60
  text "RAIL" at 7561.86,-1738.69 h60
  text "METAL" at 8053.68,-1738.69 h60
  text "X" at 8428.9,-1739.04 h60
  text "SILK" at 8565.36,-1738.69 h60
  text ".Layer_Name" at -4434.1,-3547.53 h60
M11 Gerber Information:
  lines w10: -5303.1,-3619.21 1296.9,-3619.21 ; -5303.1,-3415.87 1298.9,-3415.87 ; -5303.1,-3212.54 -5303.1,-3822.54 -1298.1,-3822.54 1298.9,-3822.54 1298.9,-3212.54 -5302.6,-3212.54 -5302.6,-3822.54 -3727.1,-3822.54 ; -2838.1,-3822.54 -2838.1,-3212.54 ; -1571.1,-3415.87 -1571.1,-3212.54 ; -731.1,-3415.87 -731.1,-3212.54 ; -109.1,-3829.04 -109.1,-3626.21
  text "ALL ARTWORK VIEWED FROM TOP SIDE" at -5239.6,-3344.71 h60
  text "BOARD #:" at -2763.1,-3344.71 h60
  text ".PRJ_Number" at -2217.6,-3344.71 h60
  text "REV:" at -1373.1,-3344.71 h60
  text ".PCB_Rev" at -1081.6,-3344.71 h60
  text "SVN REV:" at -535.1,-3344.71 h60
  text ".VersionControl_RevNumber" at -29.1,-3344.71 h60
  text "LAYER NAME =" at -5239.6,-3547.53 h60
  text "PLOT NAME =" at -5239.6,-3753.38 h60
  text ".plot_File_Name" at -4434.1,-3753.38 h60
  text "GENERATED    :" at -2761.1,-3753.38 h60
  text ".Print_Date" at -1891.6,-3753.38 h60
  text ".Print_Time" at -1162.6,-3753.38 h60
  text "TEXAS INSTRUMENTS" at 101.9,-3753.38 h60
  text "LAYER NAME =" at -901.37,-5448.72 h60
  text "PLOT NAME =" at -901.37,-5654.56 h60
M12 Stackup:
  drawing of 191 lines, arcs and shapes, not listed
  text "Layer" at 4779.24,5140.96 h60
  text "Name" at 5189.16,5140.96 h60
  text "Material" at 6118.9,5140.96 h60
  text "Thickness" at 6978.67,5140.96 h60
  text "Constant" at 7628.5,5140.96 h60
  text "Board Layer Stack" at 8198.37,5140.96 h60
  text "1" at 4779.24,5020.96 h60
  text "Top Overlay" at 5189.16,5020.96 h60
  text "2" at 4779.24,4900.96 h60
  text "Top Solder" at 5189.16,4900.96 h60
  text "Solder Resist" at 6118.9,4900.96 h60
  text "0,40mil" at 6978.67,4900.96 h60
  text "3,5" at 7628.5,4900.96 h60
  text "3" at 4779.24,4780.96 h60
  text "Top Layer" at 5189.16,4780.96 h60
  text "Copper" at 6118.9,4780.96 h60
  text "1,40mil" at 6978.67,4780.96 h60
  text "4" at 4779.24,4660.96 h60
  text "Dielectric1" at 5189.16,4660.96 h60
  text "FR-4" at 6118.9,4660.96 h60
  text "59,20mil" at 6978.67,4660.96 h60
  text "4,8" at 7628.5,4660.96 h60
  text "5" at 4779.24,4540.96 h60
  text "Bottom Layer" at 5189.16,4540.96 h60
  text "Copper" at 6118.9,4540.96 h60
  text "1,40mil" at 6978.67,4540.96 h60
  text "6" at 4779.24,4420.96 h60
  text "Bottom Solder" at 5189.16,4420.96 h60
  text "Solder Resist" at 6118.9,4420.96 h60
  text "0,40mil" at 6978.67,4420.96 h60
  text "3,5" at 7628.5,4420.96 h60
  text "7" at 4779.24,4300.96 h60
  text "Bottom Overlay" at 5189.16,4300.96 h60
  text ".Layer_Name" at -4434.1,-3547.53 h60
M13 Component Bodies Top:
  text ".Layer_Name" at -4434.1,-3547.53 h60
M14 Component Bodies Bottom:
  text ".Layer_Name" at -4434.1,-3547.53 h60
M15 Courtyards Top:
  text ".Layer_Name" at -4434.1,-3547.53 h60
M16 Courtyards Bottom:
  text ".Layer_Name" at -4434.1,-3547.53 h60
Drill Drawing:
  text ".Layer_Name" at -4434.1,-3547.53 h60

## Dimensions
-12,0 to -12,928 on M5 Assembly Top
-5011.1,-3089.04 to -4011.1,-3089.04 on M2 Board Dimensions
1874,0 to 0,0 on M5 Assembly Top

## Text inside footprints (layer, text, board x,y; h text height)
J2: Top Overlay "13" at 237.21,83.12 h28; Top Overlay "14" at 339.57,86.07 h28; Top Overlay "1" at 250.98,848.87 h28; Top Overlay "2" at 353.35,848.87 h28 r359.49
J101: Top Overlay "14" at 632,107 h28 r90; Top Overlay "13" at 629,208 h28 r90; Top Overlay "1" at 1398,222 h28 r90; Top Overlay "2" at 1398,121 h28 r90